# Altium PCB Aether.PcbDoc
Units mm, origin at the board's own origin, x right, y up, seen from the top; angles counter-clockwise.
Board outline 60 x 77 mm, 2 copper layers (Top Layer, Bottom Layer), stack 1.584 mm thick; 4 components, 1 nets, 92 pads, 0 vias.
Unrouted connection lines stored in the file: 1.
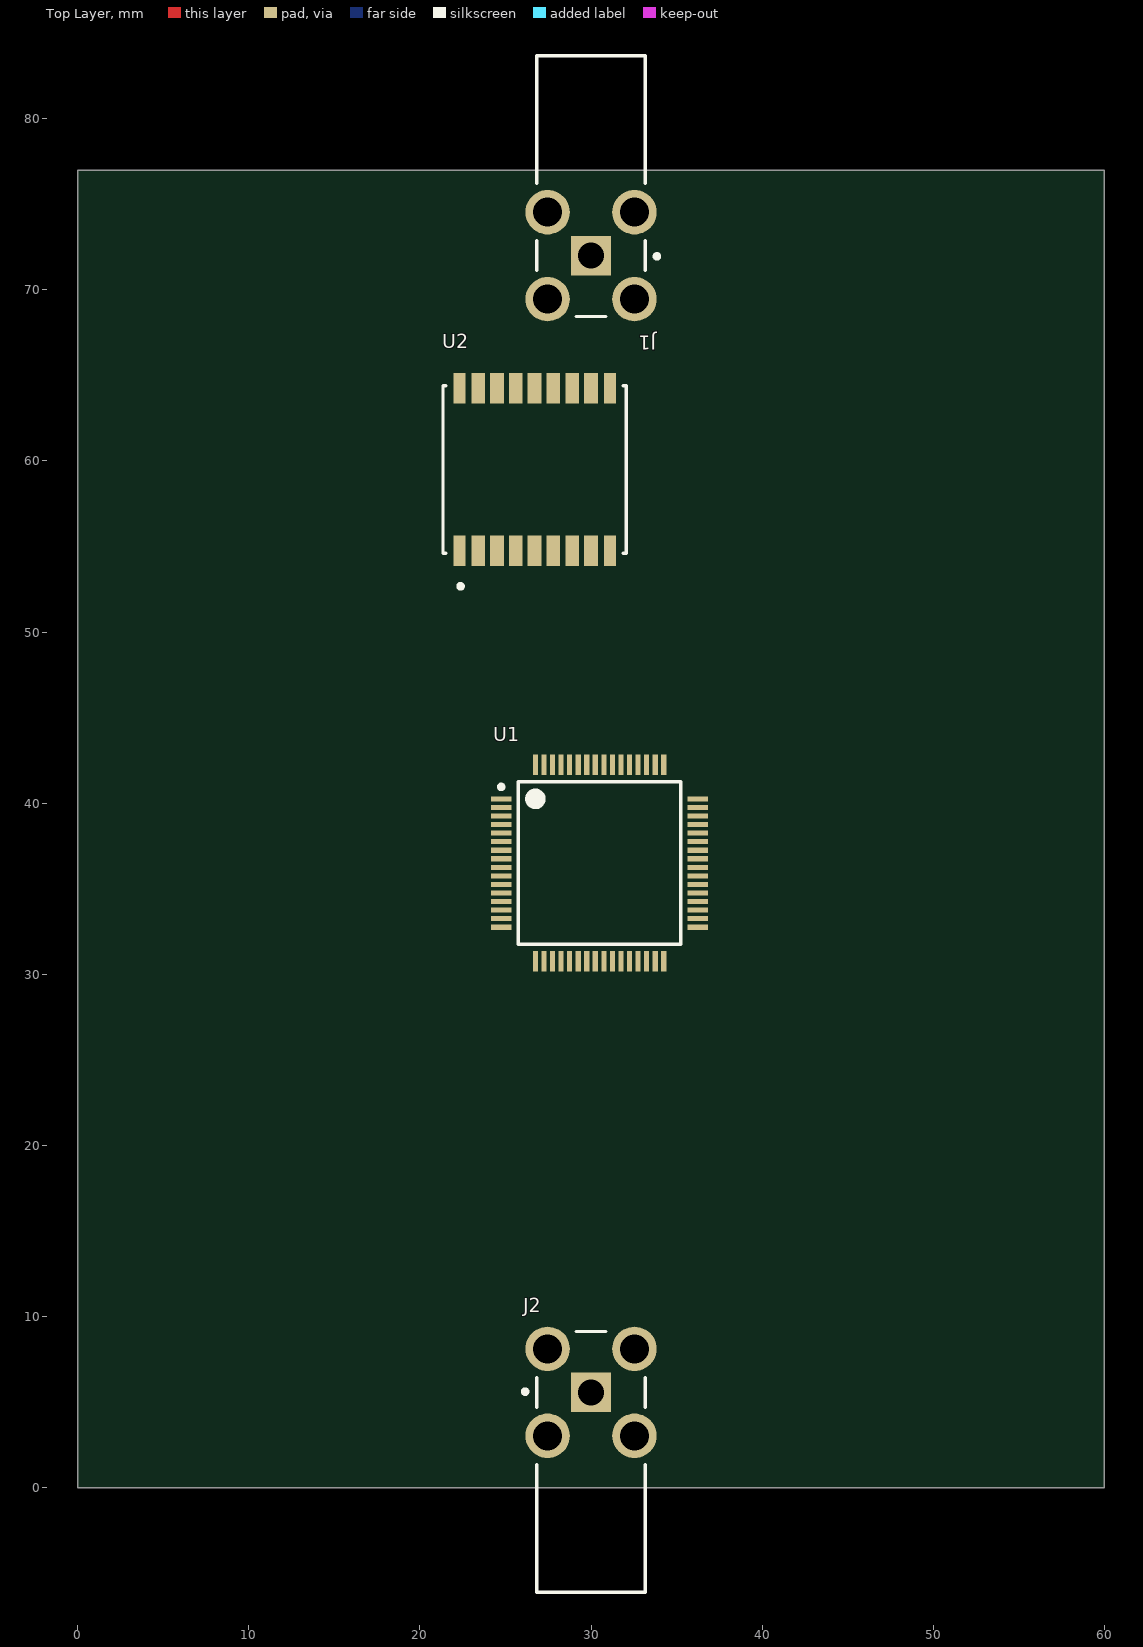
[diagram p0: Top Layer view]
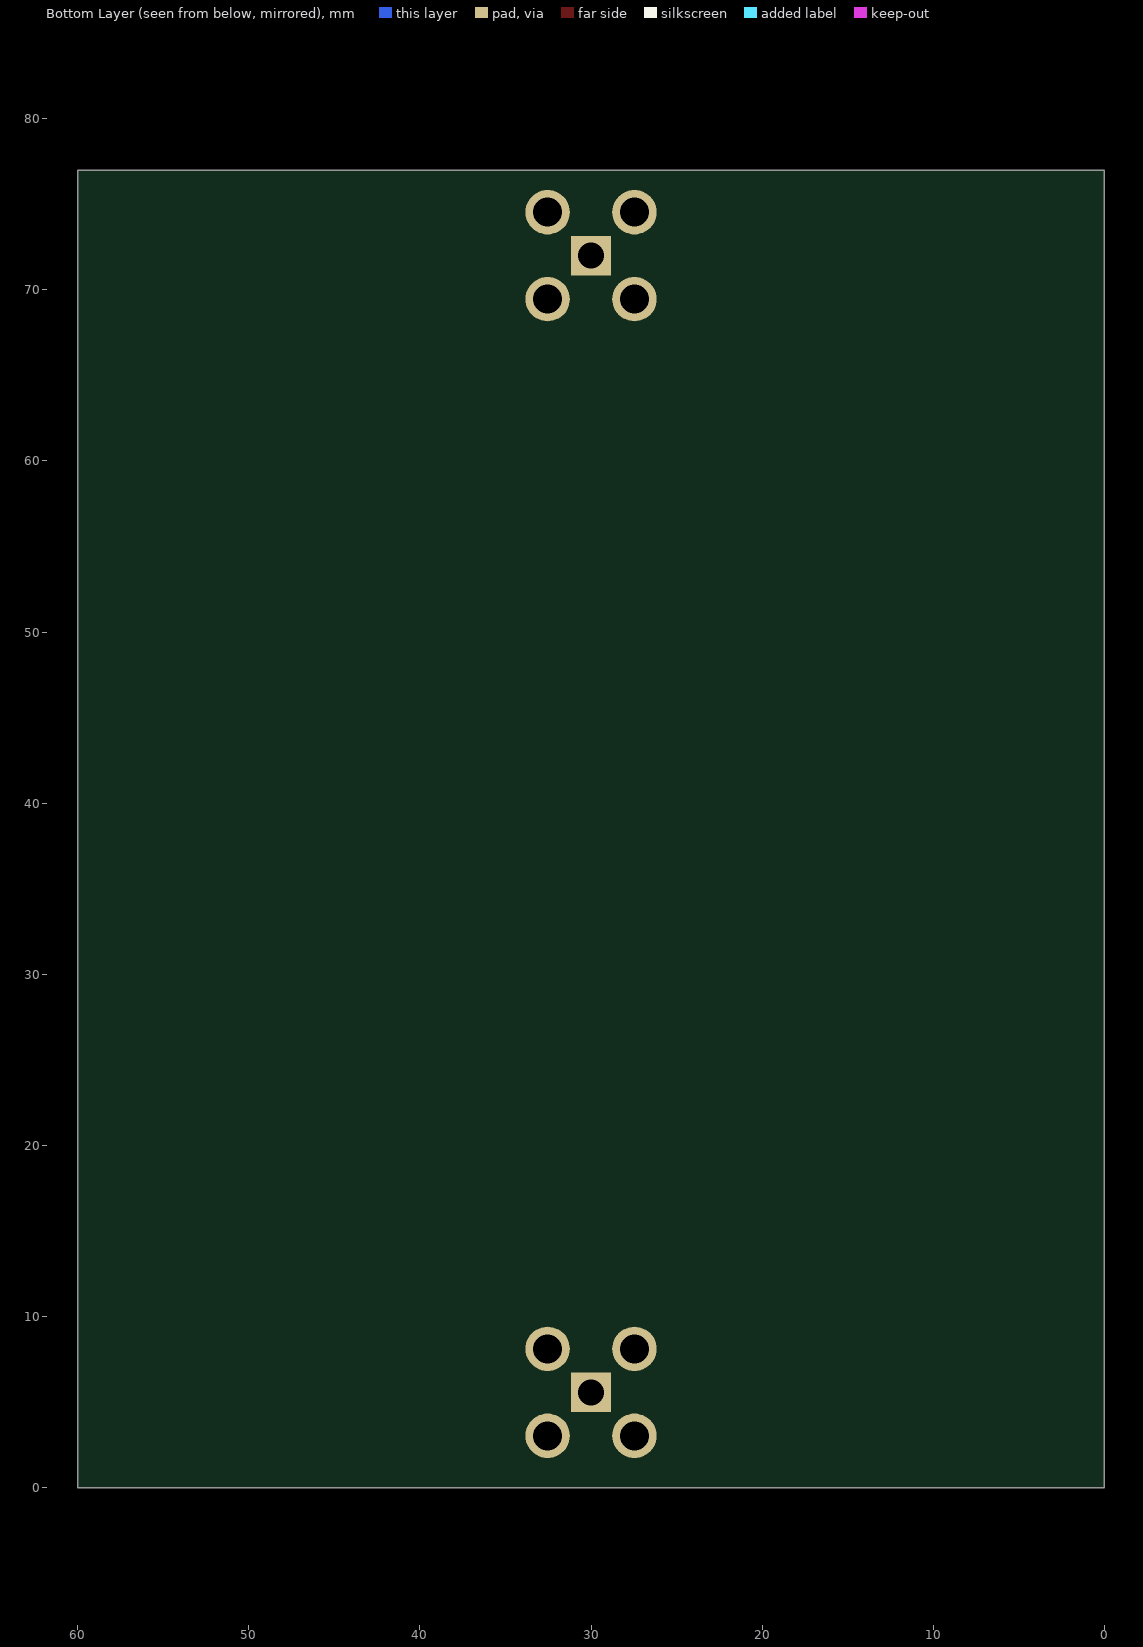
[diagram p1: Bottom Layer view, seen from below]

## Layer stack, top to bottom
Top Solder Mask: solder mask 0.005, Solder Resist, Dk 3.5
Top Layer: signal copper 0.035
Dielectric 1: core 1.514, FR-4, Dk 4.2
Bottom Layer: signal copper 0.035
Botom Solder Mask: solder mask 0.005, Solder Resist, Dk 3.5

## Board outline
0,0 60,0 60,77 0,77

## Design rules (kind name [scope] priority, off if disabled: settings)
AssemblyTestPointUsage [All] p1 off:
AssemblyTestpoint [All] p1 off: testpointundercomponent=TRUE minsize=1.016 maxsize=2.54 preferedsize=1.524 minholesize=0 maxholesize=1.016 preferedholesize=0.813 testpointgrid=0.025 usegrid=TRUE gridtolerance=0 allowsidetop=TRUE allowsidebottom=TRUE
BoardOutlineClearance X_BoardOutlineClearance [HasFootprint('MOUSE_BITES_3X_2_4MM') or  HasFootprint('MOUSE_BITES_5X_2_4MM') or HasFootprint('IN_TAB_2_4_EXT')] p1: gap=0 ignorepadtopadclearanceinfootprint=FALSE // Excluded components
BoardOutlineClearance [All] p2: gap=0.3 ignorepadtopadclearanceinfootprint=FALSE
Clearance "NPT Hole" [(InPadClass('NPTH'))] p1: gap=0.3 ignorepadtopadclearanceinfootprint=FALSE except(0: Arc-Hole Track-Hole SMDPad-Hole THPad-Hole Via-Hole Fill-Hole Poly-Hole Region-Hole Text-Hole) // Copper Clearance to NPT Hole
Clearance [All] p2: gap=0.2 ignorepadtopadclearanceinfootprint=FALSE except(0: Arc-Hole Track-Hole SMDPad-Hole THPad-Hole Via-Hole Fill-Hole Poly-Hole Region-Hole Text-Hole)
ComponentClearance [Not (HasFootprint('PASTE_STENCIL')) vs Not (HasFootprint('PASTE_STENCIL'))] p1: gap=0.25 collisioncheckmode=3 verticalgap=0.25 showdistances=TRUE
FabricationTestPointUsage [All] p1 off: valid=0 allowmultiple=FALSE
FabricationTestpoint [All] p1 off: side=3 testpointundercomponent=TRUE minsize=1.016 maxsize=2.54 preferedsize=1.524 minholesize=0 maxholesize=1.016 preferedholesize=0.813 testpointgrid=0.025 allowsidetop=TRUE allowsidebottom=TRUE usegrid=TRUE gridtolerance=0
HoleSize [All] p1: absolutevalues=TRUE maxlimit=6 minlimit=0.35 maxpercent=80.000 minpercent=20.000
HoleToHoleClearance [All] p1: gap=0.25 allowstackedmicrovias=TRUE
MinimumAnnularRing [All] p1: minimumring=0.2
MinimumSolderMaskSliver [All] p1: minsoldermaskwidth=0.07
PlaneClearance [All] p1: clearance=0.15
PlaneConnect [All] p1: planeconnectstyle=Relief reliefexpansion=0.5 reliefentries=4 reliefconductorwidth=0.25 reliefairgap=0.25
PolygonConnect "Via Connect" [IsVia] p1: connectstyle=Direct reliefconductorwidth=0.254 reliefentries=4 polygonreliefangle="90 Angle" airgapwidth=0.254 // Via connection style
PolygonConnect [All] p2: connectstyle=Relief reliefconductorwidth=0.25 reliefentries=4 polygonreliefangle="90 Angle" airgapwidth=0.25
RoutingCorners [All] p1: cornerstyle=45-Degree minsetback=2.5 maxsetback=2.5
RoutingVias [All] p1: holewidth=0.4 width=0.8 viastyle="Through Hole" minholewidth=0.2 minwidth=0.6 maxholewidth=1 maxwidth=1.6 useviatemplates=TRUE viatemplateguid#1={26E1B80A-D5C0-4505-9623-F9CB59458B7C} viatemplateguid#2={36E1CC21-96E2-49A4-88B6-F2B68A4AE673} viatemplateguid#3={0111366E-BFF6-48C7-B537-6C96D691991D} viatemplateguid#4={0E0C0ADB-85E7-4A3B-837A-9DB01CC425C1} viatemplateguid#5={2AE59D33-7222-4D26-9EBE-4F327D78EEDC} viatemplateguid#6={04F958C5-3098-48F3-841F-9266846BFB57} viatemplateguid#7={3EBD0A92-59C6-4A03-9F1B-9C85124118A6} viatemplateguid#8={D374DE30-929E-4757-A35D-CCDF97954E77} viatemplateguid#9={7387BB7D-B2C7-482F-BFEA-A07FA82CF54E} viatemplatename#1=v50h15m22 viatemplatename#2=v60h20m28 viatemplatename#3=v80h40m48 viatemplatename#4=v110h70m78 viatemplatename#5=v140h90 viatemplatename#6=v160h100m108 viatemplatename#7=v170h110 viatemplatename#8=v200h130 viatemplatename#9=v260h150
SMDEntry [All] p1: side=TRUE corner=FALSE anyangle=FALSE
SMDEntry ResistorArray_Exit [HasFootprint('CAC-50P200X100-8M')] p2: side=TRUE corner=FALSE anyangle=FALSE
SMDToCorner ResistorArray_NeckDown [HasFootprint('CAC-50P200X100-8M')] p1: distance=78740
SilkToSilkClearance [All] p1: silktosilkclearance=0.1
SilkToSolderMaskClearance [IsPad] p1: minsilkscreentomaskgap=0.1 clearancetoexposedcopper=FALSE
SolderMaskExpansion "PTH Via" [IsVia] p1: expansion=0.075 istentingtop=FALSE soldermaskfromhole=TRUE
SolderMaskExpansion [All] p2: expansion=0.1 istentingtop=FALSE
Width [All] p1: maxlimit=5 minlimit=0.15 preferedwidth=0.3
17 further rules are at their usual default settings.

## Classes and differential pairs
component class main: J1 J2 U2
component class U_MCU: U1

## Components (designator, comment, footprint, x,y, rotation, side; value= is the part's Value field where it differs from the comment)
J1 "221790-1" FP-221790-1-MFG 30,76.064 r270 top
J2 "221790-1" FP-221790-1-MFG 30,1.5 r90 top
U1 "STM32F105R8T6" STM-LQFP64_V 30.5,36.5 r0 top
U2 "MAX-M8Q-0" FP-MAX-M8Q-0-MFG 26.7,59.5 r90 top

## Footprints (in the part's own frame and the unit in brackets; to place one, negate y for a bottom-side part, rotate by r counter-clockwise, add the part's x,y. Pads: shape width x height; smd on the part's side, far side on the other; paste and mask are expansions set on the pad)
FP-221790-1-MFG [mil]
  rect 91.5x91.5 hole 60 paste-39370.1 mask+0: 1(160,0)
  round 102.43 hole 67 paste-39370.1 mask+0: 2(60,100) 3(260,100) 4(60,-100) 5(260,-100)
  silkscreen extent -300,-125 300,156, body extent -304,-155 315,155, height 10
FP-MAX-M8Q-0-MFG [mm]
  rect 1.8x0.7 smd paste-1000 mask-1000: 1(-4.75,4.4) 9(-4.75,-4.4) 10(4.75,-4.4) 18(4.75,4.4)
  rect 1.8x0.8 smd paste-1000 mask-1000: 2(-4.75,3.3) 3(-4.75,2.2) 4(-4.75,1.1) 5(-4.75,0) 6(-4.75,-1.1) 7(-4.75,-2.2) 8(-4.75,-3.3) 11(4.75,-3.3) 12(4.75,-2.2) 13(4.75,-1.1) 14(4.75,0) 15(4.75,1.1) 16(4.75,2.2) 17(4.75,3.3)
  silkscreen extent -6.95,-5.35 4.9,5.35, body extent -6.35,-5.45 6.35,5.45, height 0.25
STM-LQFP64_V [mm] "Thin QFP, 64-Leads, Body 10x10mm, Pitch 0.5mm, ST Recommended"
  rect 1.2x0.3 smd: 1(-5.75,3.75) 2(-5.75,3.25) 3(-5.75,2.75) 4(-5.75,2.25) 5(-5.75,1.75) 6(-5.75,1.25) 7(-5.75,0.75) 8(-5.75,0.25) 9(-5.75,-0.25) 10(-5.75,-0.75) 11(-5.75,-1.25) 12(-5.75,-1.75) 13(-5.75,-2.25) 14(-5.75,-2.75) 15(-5.75,-3.25) 16(-5.75,-3.75) 33(5.75,-3.75) 34(5.75,-3.25) 35(5.75,-2.75) 36(5.75,-2.25) 37(5.75,-1.75) 38(5.75,-1.25) 39(5.75,-0.75) 40(5.75,-0.25) 41(5.75,0.25) 42(5.75,0.75) 43(5.75,1.25) 44(5.75,1.75) 45(5.75,2.25) 46(5.75,2.75) 47(5.75,3.25) 48(5.75,3.75)
  rect 0.3x1.2 smd: 17(-3.75,-5.75) 18(-3.25,-5.75) 19(-2.75,-5.75) 20(-2.25,-5.75) 21(-1.75,-5.75) 22(-1.25,-5.75) 23(-0.75,-5.75) 24(-0.25,-5.75) 25(0.25,-5.75) 26(0.75,-5.75) 27(1.25,-5.75) 28(1.75,-5.75) 29(2.25,-5.75) 30(2.75,-5.75) 31(3.25,-5.75) 32(3.75,-5.75) 49(3.75,5.75) 50(3.25,5.75) 51(2.75,5.75) 52(2.25,5.75) 53(1.75,5.75) 54(1.25,5.75) 55(0.75,5.75) 56(0.25,5.75) 57(-0.25,5.75) 58(-0.75,5.75) 59(-1.25,5.75) 60(-1.75,5.75) 61(-2.25,5.75) 62(-2.75,5.75) 63(-3.25,5.75) 64(-3.75,5.75)
  silkscreen extent -5.87,-4.75 4.75,4.75, body extent -5,-5 5,5, height 1.6

## Part data
J1 J2: library part CMP-05166-000001-1, "CONN SMA JACK R/A 50 OHM PCB", Dielectric Material=Fluoropolymer, Frequency=4GHz, Manufacturer="TE Connectivity / AMP", Package=0, Temperature="-65°C to +165°C", Temperature Range High=+165°C, Temperature Range Low=-65°C, Voltage Rating=335V, Automotive=No, Category=Conn, ComponentLink2Description=Datasheet, ComponentLink2URL=https://www.te.com/commerce/DocumentDelivery/DDEController?Action=showdoc&DocId=Customer+Drawing%7F221790%7FB1%7Fpdf%7FEnglish%7FENG_CD_221790_B1.pdf%7F221790-1, Conn Orientation="Right Angle", Contact Material=Gold, Device Class L1=Connectors, Device Class L2="RF / Coaxial Connectors", Device Class L3=unset, Digikey Description="CONN SMA JACK R/A 50 OHM PCB", Height=0.38inch, Impedance=50Ω, Is Female=yes, Lead Free=Yes, Manufacturer Part Number=221790-1, Mouser Description="RF Connectors / Coaxial Connectors PCB RIGHT ANGLE JACK", Number Of Contacts=1, Octopart=https://octopart.com/2217901-te+connectivity+%2F+amp-3339836, RoHS=TRUE, Shielding=true
U1: library part CMP-0237-00225-3, "ARM Cortex-M3 32-bit MCU, 64 KB Flash, 64 KB Internal RAM, 51 I/Os, 64-pin LQFP, -40 to 85 degC, Tray", I/Os (High Current)=51, Operating Frequency(F) (Processor speed) (MHz)=72, Supply Voltage(Vcc) min (V)=2, A/D Converter="2x12-bit (16 Channel)", ComponentLink1Description="Manufacturer URL", ComponentLink1URL=http://www.st.com/web/en/home.html, ComponentLink2Description=Datasheet, ComponentLink2URL=http://www.st.com/st-web-ui/static/active/en/resource/technical/document/datasheet/CD00220364.pdf, ComponentLink3Description="Package Specification", ComponentLink3URL=http://www.st.com/st-web-ui/static/active/en/resource/technical/document/datasheet/DM00037051.pdf, Core="ARM Cortex-M3", D/A Converter="2x12-bit (2 Channel)", DatasheetVersion="Rev. 6", FLASH Size (Prog) (kB)=64, Internal RAM Size (kB)=64, Mounting Technology="Surface Mount", PackageDescription="64-Pin Low Profile Quad Flat Package, 10 x 10 mm Body, 0.5 mm Pitch", PackageReference=LQFP64, PackageVersion="Rev. 4, 06/2013", Packing=Tray, PartNumber=STM32F105R8T6
U2: library part CMP-207130-000017-1, "RF RCVR GNSS/GPS 1.575GHZ 18LCC", Case/Package=SMD/SMT, Current - Receiving=23mA, Frequency=1.575GHz, Max Operating Temperature=85°C, Min Operating Temperature=-40°C, Interface=I2C, Packaging="Cut Tape", RoHS Compliant=Yes, Sensitivity=-167dBm

## Nets (pads, with @x,y where several pads share a name; then routed paths per layer and width w, separated by ;. In a path a pad name is that pad's centre, name@x,y a point inside that pad or via, vN(x,y) a via of type N, cw(c..) or ccw(c..) an arc to the next point about the centre after c; other vN are vias at no path point)
NetJ1_1: J1.1 U2.11
pads on no net: J1.2 J1.3 J1.4 J1.5 J2.1 J2.2 J2.3 J2.4 J2.5 U1.1 U1.2 U1.3 U1.4 U1.5 U1.6 U1.7 U1.8 U1.9 U1.10 U1.11 U1.12 U1.13 U1.14 U1.15 U1.16 U1.17 U1.18 U1.19 U1.20 U1.21 U1.22 U1.23 U1.24 U1.25 U1.26 U1.27 U1.28 U1.29 U1.30 U1.31 U1.32 U1.33 U1.34 U1.35 U1.36 U1.37 U1.38 U1.39 U1.40 U1.41 U1.42 U1.43 U1.44 U1.45 U1.46 U1.47 U1.48 U1.49 U1.50 U1.51 U1.52 U1.53 U1.54 U1.55 U1.56 U1.57 U1.58 U1.59 U1.60 U1.61 U1.62 U1.63 U1.64 U2.1 U2.2 U2.3 U2.4 U2.5 U2.6 U2.7 U2.8 U2.9 U2.10 U2.12 U2.13 U2.14 U2.15 U2.16 U2.17 U2.18

## Silkscreen, mask and mechanical layers (free items; w line width, h text height)
Panel Outline:
  the board outline again, w0.2